# EAGLE board IMU_BNO085_Schematic (EAGLE 9.5.0)
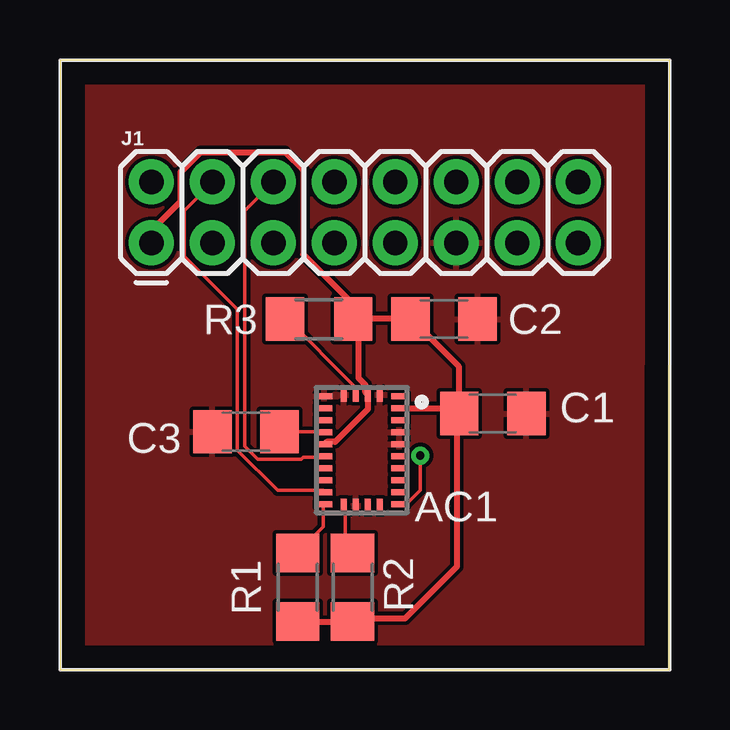
[diagram p0: board, top side]
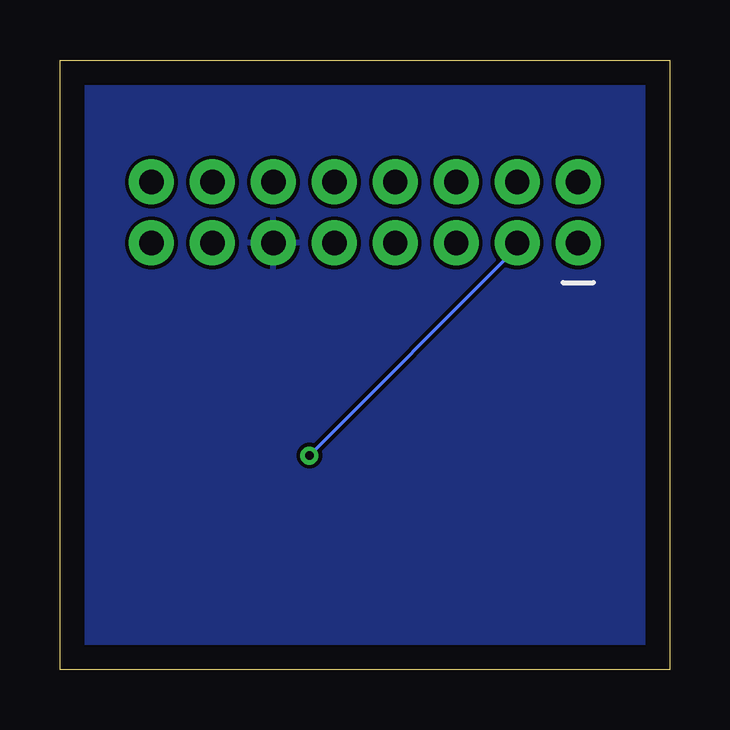
[diagram p1: board, bottom side, seen from below]

Size 25.4 x 25.4 mm. Coordinates in mm from the lower left corner, seen from the top.
Outline: 0,0 25.38,0 25.4,25.4 0,25.4 0,0
Copper layers (1*16): Top 0.035mm / dielectric 1.5mm / Bottom 0.035mm
Design rules "default *": minimum track width 6mil, minimum drill 0.35mm, track to track 6mil, track to pad 6mil, pad to pad 6mil, via to via 6mil, smd to smd 6mil, copper to edge 40mil, drill to drill 6mil, minimum pad ring 10mil, minimum via ring 8mil, stop-mask expansion 4mil, vias tented up to drill 0mil, thermal gap 6mil
Net classes: 0 default: width 0.152 mm; 1 GND: width 0.254 mm; 2 PWR: width 0.254 mm

## Footprints (pad centres in the part's own frame; a part is rotated, then mirrored left to right if it is on the bottom)
BNO085 = smd 0.675 x 0.25: 1 1.563,2.25; 6 -1.563,2.25; 7 -1.563,1.75; 8 -1.563,1.25; 9 -1.563,0.75; 10 -1.563,0.25; 11 -1.563,-0.25; 12 -1.563,-0.75; 13 -1.563,-1.25; 14 -1.563,-1.75; 15 -1.563,-2.25; 20 1.563,-2.25; 21 1.563,-1.75; 22 1.563,-1.25; 23 1.563,-0.75; 24 1.563,-0.25; 25 1.563,0.25; 26 1.563,0.75; 27 1.563,1.25; 28 1.563,1.75 | smd 0.25 x 0.575: 2 0.75,2.313; 3 0.25,2.313; 4 -0.25,2.313; 5 -0.75,2.313; 16 -0.75,-2.313; 17 -0.25,-2.313; 18 0.25,-2.313; 19 0.75,-2.313
C1206 = smd 1.6 x 1.8: 1 -1.4,0; 2 1.4,0
2X7 = drill 1.016 pad 1.88: 1 -8.89,5.08; 2 -8.89,7.62; 3 -6.35,5.08; 4 -6.35,7.62; 5 -3.81,5.08; 6 -3.81,7.62; 7 -1.27,5.08; 8 -1.27,7.62; 9 1.27,5.08; 10 1.27,7.62; 11 3.81,5.08; 12 3.81,7.62; 13 6.35,5.08; 14 6.35,7.62; 15 8.89,5.08; 16 8.89,7.62
R1206 = smd 1.6 x 1.803: 1 -1.422,0; 2 1.422,0

## Placement (x,y rotation side)
AC1  BNO085  [BNO085]  12.57,9.14 0 top
C1  0.1u  [C1206]  18.03,10.67 0 top
C2  0.1u  [C1206]  16,14.61 0 top
C3  0.1u  [C1206]  7.75,9.91 180 top
J1  2X6 FEMALE  [2X7]  12.7,12.7 0 top
R1  2.2k  [R1206]  9.91,3.43 270 top
R2  2.2k  [R1206]  12.19,3.43 270 top
R3  10k  [R1206]  10.79,14.61 0 top

## Library data of the parts
AC1 = BNO085; DESCRIPTION: IMU ACCEL/GYRO/MAG I2C 32BIT; HEIGHT: 1.18mm; MANUFACTURER_NAME: Hillcrest Laboratories, Inc.; MANUFACTURER_PART_NUMBER: BNO085
C1-C3 R1-R3 = RTR Main Library
J1 = RTR Main Library; PROD_ID: CONN-12423

## Nets
5V [PWR]: J1.2
GND [GND]: AC1.2 AC1.5 AC1.6 AC1.17 AC1.25 AC1.26 C1.2 C2.2 C3.2 J1.11
INT: AC1.14 J1.4
N$1: AC1.16 R2.1
N$2: AC1.15 R1.1
N$3: AC1.9 C3.1
N$8: AC1.4 R3.1
RST: AC1.11 J1.6
SCL: AC1.19 J1.5
SDA: AC1.20 J1.3
VCC [PWR]: AC1.3 AC1.10 AC1.28 C1.1 C2.1 J1.1 R1.2 R2.2 R3.2

## Tracks (layer width: path | path; a pad name or v marks a point on that pad's centre or on a via)
GND
  pour Top: -3.81,27.94 29.21,27.94 29.21,-2.54 -3.81,-2.54
  pour Bottom: -6.35,29.21 30.48,29.21 30.48,-3.81 -6.35,-3.81
INT
  Top 0.152: AC1.14 10.97,7.47 9.07,7.47 7.39,9.14 7.39,15.01 5.18,17.22 5.18,19.13 6.33,20.27 J1.4
N$1
  Top 0.152: AC1.16 11.89,6.78 11.89,5.18 12.19,4.88 R2.1
N$2
  Top 0.152: AC1.15 10.97,6.86 10.97,5.94 9.91,4.88 R1.1
N$3
  Top 0.152: AC1.9 10.97,9.91 9.22,9.91 C3.1
N$8
  Top 0.152: AC1.4 12.27,11.51 12.27,11.81 9.45,14.63 R3.1
RST
  Top 0.152: AC1.11 10.97,8.84 10.13,8.84 10.06,8.76 8.23,8.76 7.7,9.3 7.7,19.13 8.84,20.27 J1.6
SDA  (via drill 0.35)
  Top 0.152: v15.01,8.91 15.01,7.47 14.48,6.93 14.17,6.93 AC1.20
  Bottom 0.152: v15.01,8.91 6.4,17.53 6.4,17.75 J1.3
VCC
  Top 0.254: R1.2 9.91,1.98 12.19,1.98 R2.2 12.19,2.13 14.38,2.13 16.54,4.29 16.54,10.59 | 12.45,14.63 12.27,14.63 R3.2 12.19,14.71 12.19,15.24 10.13,17.3 10.13,20.8 9.37,21.57 5.87,21.57 5.03,20.73 5.03,19.51 3.81,18.29 3.81,17.83 J1.1 | 12.45,14.63 14.55,14.63 C2.1 14.71,14.55 16.61,12.65 16.61,10.67 C1.1 16.54,10.59 | 12.45,14.63 12.45,12.14 12.73,11.86 12.73,11.55 AC1.3 12.82,10.85 11.46,9.49 11.11,9.49 AC1.10 | AC1.28 16.23,10.89 16.54,10.59